# Altium PCB 7953_IDC_TO_RS.PcbDoc
Units mil, origin at the board's own origin, x right, y up, seen from the top; angles counter-clockwise.
Board outline 2874.02 x 2007.87 mil, 2 copper layers (Top Layer, Bottom Layer); 3 components, 30 nets, 204 pads, 0 vias.
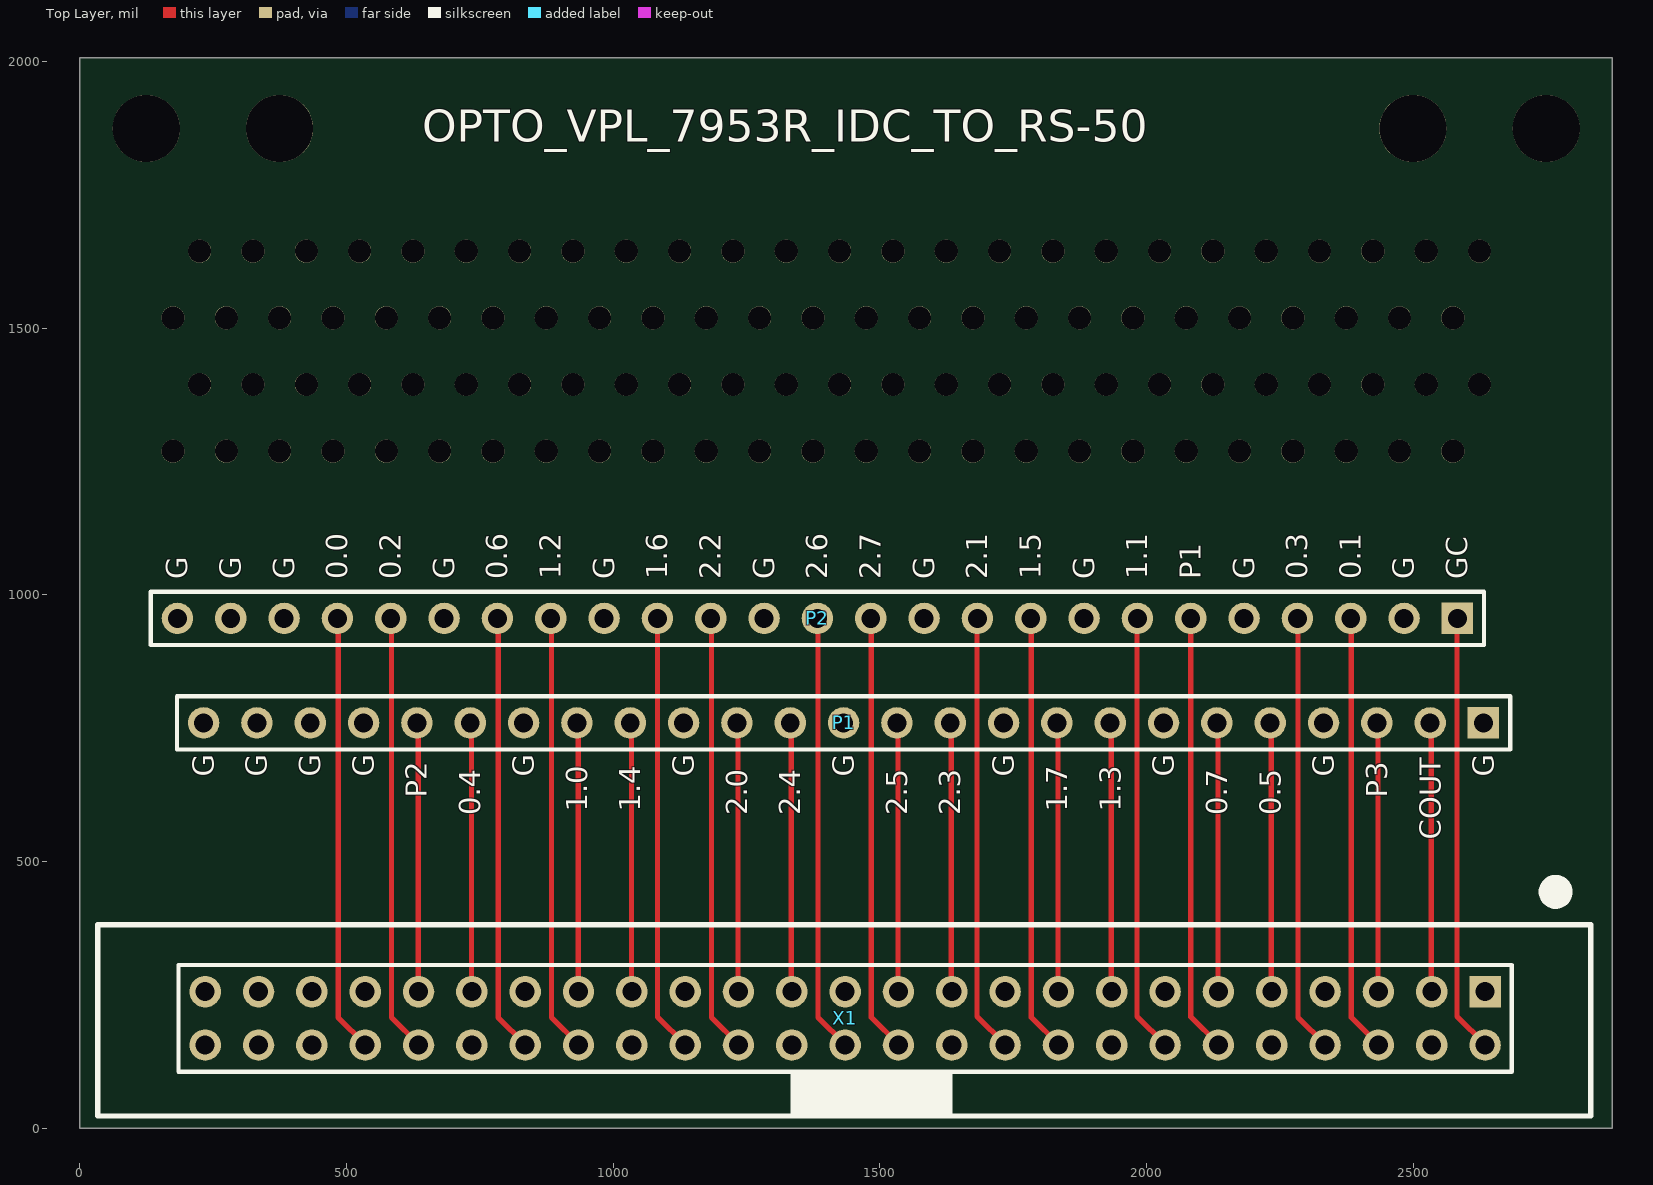
[diagram p0: Top Layer view]
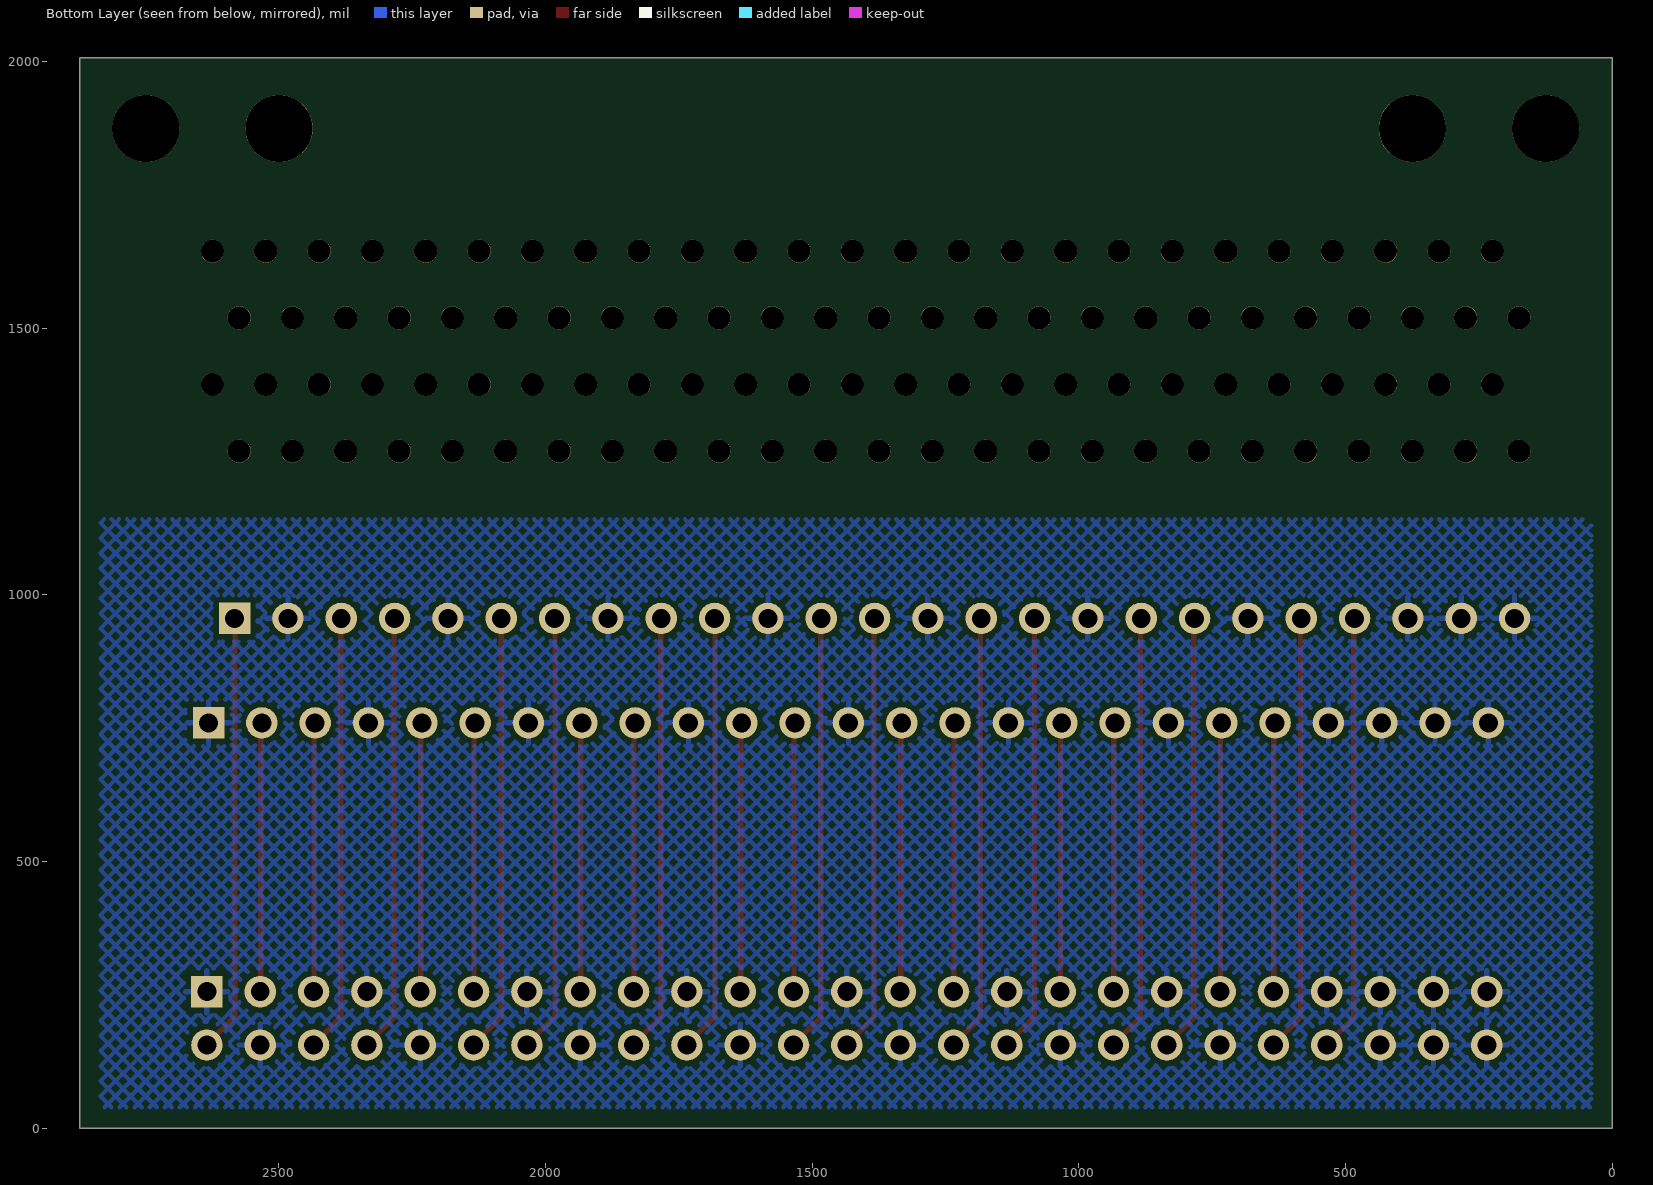
[diagram p1: Bottom Layer view, seen from below]

## Layer stack, top to bottom
Top Solder: solder mask 0.4, Solder Resist, Dk 3.5
Top Layer: signal copper 1.4
Dielectric 1: dielectric 12.6, FR-4, Dk 4.8
Bottom Layer: signal copper 1.4
Bottom Solder: solder mask 0.4, Solder Resist, Dk 3.5

## Board outline
-0.4,-0.41 -0.4,2007.46 2873.61,2007.46 2873.61,-0.41

## Design rules (kind name [scope] priority, off if disabled: settings)
Clearance [All] p1: gap=10 ignorepadtopadclearanceinfootprint=FALSE except(0: Arc-Hole Track-Hole SMDPad-Hole THPad-Hole Via-Hole Fill-Hole Poly-Hole Region-Hole Text-Hole)
PolygonConnect [All] p1: connectstyle=Relief reliefconductorwidth=10 reliefentries=4 polygonreliefangle="90 Angle" airgapwidth=10
RoutingVias [All] p1: holewidth=28 width=50 viastyle="Through Hole" minholewidth=28 minwidth=50 maxholewidth=28 maxwidth=50
SolderMaskExpansion [All] p1: expansion=4 istentingtop=FALSE
Width [All] p1: maxlimit=10 minlimit=10 preferedwidth=10
30 further rules are at their usual default settings.

## Classes and differential pairs
component class 7953_IDC_TO_RS: P1 X1

## Components (designator, comment, footprint, x,y, rotation, side; value= is the part's Value field where it differs from the comment)
P1 "Header 25" HDR1X25 2632,760 r180 top
P2 "Header 25" HDR1X25 2583,956 r180 top
X1 "IDC_7953" IDC_DIO 2635,256 r180 top

## Footprints (in the part's own frame and the unit in brackets; to place one, negate y for a bottom-side part, rotate by r counter-clockwise, add the part's x,y. Pads: shape width x height; smd on the part's side, far side on the other; paste and mask are expansions set on the pad)
HDR1X25 [mm] "Connector; Header; 25 Position"
  rect 1.5x1.5 hole 0.9: 1(0,0)
  round 1.5 hole 0.9: 2(2.54,0) 3(5.08,0) 4(7.62,0) 5(10.16,0) 6(12.7,0) 7(15.24,0) 8(17.78,0) 9(20.32,0) 10(22.86,0) 11(25.4,0) 12(27.94,0) 13(30.48,0) 14(33.02,0) 15(35.56,0) 16(38.1,0) 17(40.64,0) 18(43.18,0) 19(45.72,0) 20(48.26,0) 21(50.8,0) 22(53.34,0) 23(55.88,0) 24(58.42,0) 25(60.96,0)
  silkscreen extent -1.27,-1.27 62.23,1.27
IDC_DIO [mm]
  rect 1.5x1.5 hole 0.9: 1(0,0)
  round 1.5 hole 0.9: 2(0,2.54) 3(2.54,0) 4(2.54,2.54) 5(5.08,0) 6(5.08,2.54) 7(7.62,0) 8(7.62,2.54) 9(10.16,0) 10(10.16,2.54) 11(12.7,0) 12(12.7,2.54) 13(15.24,0) 14(15.24,2.54) 15(17.78,0) 16(17.78,2.54) 17(20.32,0) 18(20.32,2.54) 19(22.86,0) 20(22.86,2.54) 21(25.4,0) 22(25.4,2.54) 23(27.94,0) 24(27.94,2.54) 25(30.48,0) 26(30.48,2.54) 27(33.02,0) 28(33.02,2.54) 29(35.56,0) 30(35.56,2.54) 31(38.1,0) 32(38.1,2.54) 33(40.64,0) 34(40.64,2.54) 35(43.18,0) 36(43.18,2.54) 37(45.72,0) 38(45.72,2.54) 39(48.26,0) 40(48.26,2.54) 41(50.8,0) 42(50.8,2.54) 43(53.34,0) 44(53.34,2.54) 45(55.88,0) 46(55.88,2.54) 47(58.42,0) 48(58.42,2.54) 49(60.96,0) 50(60.96,2.54)
  silkscreen extent -5.03,-5.14 66.07,5.92

## Part data
P1 P2: "Header, 25-Pin", LatestRevisionDate=17-Jul-2002, LatestRevisionNote="Re-released for DXP Platform.", Publisher="Altium Limited"

## Free pads (board coordinates)
  round 125.98 hole 125.98 unplated: 0(124.6,1874.59) 0(374.6,1874.59) 0(2499.6,1874.59) 0(2749.6,1874.59)
  round 43.31 hole 43.31 unplated: 0(174.6,1269.59) 0(174.6,1519.59) 0(224.6,1394.59) 0(224.6,1644.59) 0(274.6,1269.59) 0(274.6,1519.59) 0(324.6,1394.59) 0(324.6,1644.59) 0(374.6,1269.59) 0(374.6,1519.59) 0(424.6,1394.59) 0(424.6,1644.59) 0(474.6,1269.59) 0(474.6,1519.59) 0(524.6,1394.59) 0(524.6,1644.59) 0(574.6,1269.59) 0(574.6,1519.59) 0(624.6,1394.59) 0(624.6,1644.59) 0(674.6,1269.59) 0(674.6,1519.59) 0(724.6,1394.59) 0(724.6,1644.59) 0(774.6,1269.59) 0(774.6,1519.59) 0(824.6,1394.59) 0(824.6,1644.59) 0(874.6,1269.59) 0(874.6,1519.59) 0(924.6,1394.59) 0(924.6,1644.59) 0(974.6,1269.59) 0(974.6,1519.59) 0(1024.6,1394.59) 0(1024.6,1644.59) 0(1074.6,1269.59) 0(1074.6,1519.59) 0(1124.6,1394.59) 0(1124.6,1644.59) 0(1174.6,1269.59) 0(1174.6,1519.59) 0(1224.6,1394.59) 0(1224.6,1644.59) 0(1274.6,1269.59) 0(1274.6,1519.59) 0(1324.6,1394.59) 0(1324.6,1644.59) 0(1374.6,1269.59) 0(1374.6,1519.59) 0(1424.6,1394.59) 0(1424.6,1644.59) 0(1474.6,1269.59) 0(1474.6,1519.59) 0(1524.6,1394.59) 0(1524.6,1644.59) 0(1574.6,1269.59) 0(1574.6,1519.59) 0(1624.6,1394.59) 0(1624.6,1644.59) 0(1674.6,1269.59) 0(1674.6,1519.59) 0(1724.6,1394.59) 0(1724.6,1644.59) 0(1774.6,1269.59) 0(1774.6,1519.59) 0(1824.6,1394.59) 0(1824.6,1644.59) 0(1874.6,1269.59) 0(1874.6,1519.59) 0(1924.6,1394.59) 0(1924.6,1644.59) 0(1974.6,1269.59) 0(1974.6,1519.59) 0(2024.6,1394.59) 0(2024.6,1644.59) 0(2074.6,1269.59) 0(2074.6,1519.59) 0(2124.6,1394.59) 0(2124.6,1644.59) 0(2174.6,1269.59) 0(2174.6,1519.59) 0(2224.6,1394.59) 0(2224.6,1644.59) 0(2274.6,1269.59) 0(2274.6,1519.59) 0(2324.6,1394.59) 0(2324.6,1644.59) 0(2374.6,1269.59) 0(2374.6,1519.59) 0(2424.6,1394.59) 0(2424.6,1644.59) 0(2474.6,1269.59) 0(2474.6,1519.59) 0(2524.6,1394.59) 0(2524.6,1644.59) 0(2574.6,1269.59) 0(2574.6,1519.59) 0(2624.6,1394.59) 0(2624.6,1644.59)

## Nets (pads, with @x,y where several pads share a name; then routed paths per layer and width w, separated by ;. In a path a pad name is that pad's centre, name@x,y a point inside that pad or via, vN(x,y) a via of type N, cw(c..) or ccw(c..) an arc to the next point about the centre after c; other vN are vias at no path point)
CLKOUT: P1.2 X1.3 | length 500.3
  Top Layer w10: X1.3@2534.24,257.59 P1.2@2534.24,757.85
GCLK0: P2.1 X1.2 | length 820.1
  Top Layer w10: P2.1@2582.24,956 2582.24,295.85 2582.24,209.85 X1.2@2634.55,157.54
GND: P1.1 P1.4 P1.7 P1.10 P1.13 P1.16 P1.19 P1.22 P1.23 P1.24 P1.25 P2.2 P2.5 P2.8 P2.11 P2.14 P2.17 P2.20 P2.23 P2.24 P2.25 X1.1 X1.4 X1.7 X1.10 X1.13 X1.16 X1.19 X1.22 X1.25 X1.28 X1.31 X1.34 X1.37 X1.40 X1.43 X1.45 X1.46 X1.47 X1.48 X1.49 X1.50
P0.0: P2.22 X1.44 | length 821.2
  Top Layer w10: P2.22@484.24,957.85 484.24,312.85 484.24,207.85 X1.44@534.55,157.54
P0.1: P2.3 X1.6 | length 821.2
  Top Layer w10: P2.3@2384.24,957.85 2384.24,326.85 2384.24,207.85 X1.6@2434.55,157.54
P0.2: P2.21 X1.42 | length 821.2
  Top Layer w10: P2.21@584.24,957.85 584.24,299.85 584.24,207.85 X1.42@634.55,157.54
P0.3: P2.4 X1.8 | length 821.2
  Top Layer w10: P2.4@2284.24,957.85 2284.24,291.85 2284.24,207.85 X1.8@2334.55,157.54
P0.4: P1.20 X1.39 | length 500.3
  Top Layer w10: X1.39@734.24,257.59 P1.20@734.24,757.85
P0.5: P1.5 X1.9 | length 500.3
  Top Layer w10: X1.9@2234.24,257.59 P1.5@2234.24,757.85
P0.6: P2.19 X1.38 | length 821.2
  Top Layer w10: P2.19@784.24,957.85 784.24,349.85 784.24,207.85 X1.38@834.55,157.54
P0.7: P1.6 X1.11 | length 500.3
  Top Layer w10: X1.11@2134.24,257.59 P1.6@2134.24,757.85
P1.0: P1.18 X1.35 | length 500.3
  Top Layer w10: X1.35@934.24,257.59 P1.18@934.24,757.85
P1.1: P2.7 X1.14 | length 822
  Top Layer w10: P2.7@1982.24,957.85 1982.24,297.85 1982.24,209.85 X1.14@2034.55,157.54
P1.2: P2.18 X1.36 | length 821.2
  Top Layer w10: P2.18@884.24,957.85 884.24,207.85 X1.36@934.55,157.54
P1.3: P1.8 X1.15 | length 500.3
  Top Layer w10: X1.15@1934.24,257.59 P1.8@1934.24,757.85
P1.4: P1.17 X1.33 | length 500.3
  Top Layer w10: X1.33@1034.24,257.59 P1.17@1034.24,757.85
P1.5: P2.9 X1.18 | length 821.2
  Top Layer w10: P2.9@1784.24,957.85 1784.24,331.85 1784.24,207.85 X1.18@1834.55,157.54
P1.6: P2.16 X1.32 | length 821.6
  Top Layer w10: P2.16@1083.24,957.85 1083.24,367.85 1083.24,208.85 X1.32@1134.55,157.54
P1.7: P1.9 X1.17 | length 500.3
  Top Layer w10: X1.17@1834.24,257.59 P1.9@1834.24,757.85
P2.0: P1.15 X1.29 | length 500.3
  Top Layer w10: X1.29@1234.24,257.59 P1.15@1234.24,757.85
P2.1: P2.10 X1.20 | length 822
  Top Layer w10: P2.10@1682.24,957.85 1682.24,303.85 1682.24,209.85 X1.20@1734.55,157.54
P2.2: P2.15 X1.30 | length 821.2
  Top Layer w10: P2.15@1184.24,957.85 1184.24,327.85 1184.24,207.85 X1.30@1234.55,157.54
P2.3: P1.11 X1.21 | length 500.3
  Top Layer w10: X1.21@1634.24,257.59 P1.11@1634.24,757.85
P2.4: P1.14 X1.27 | length 500.3
  Top Layer w10: X1.27@1334.24,257.59 P1.14@1334.24,757.85
P2.5: P1.12 X1.23 | length 500.3
  Top Layer w10: X1.23@1534.24,257.59 P1.12@1534.24,757.85
P2.6: P2.13 X1.26 | length 821.2
  Top Layer w10: P2.13@1384.24,957.85 1384.24,303.85 1384.24,207.85 X1.26@1434.55,157.54
P2.7: P2.12 X1.24 | length 821.2
  Top Layer w10: P2.12@1484.24,957.85 1484.24,338.85 1484.24,207.85 X1.24@1534.55,157.54
PFI1: P2.6 X1.12 | length 821.6
  Top Layer w10: P2.6@2083.24,957.85 2083.24,309.85 2083.24,208.85 X1.12@2134.55,157.54
PFI2: P1.21 X1.41 | length 500.3
  Top Layer w10: X1.41@634.24,257.59 P1.21@634.24,757.85
PFI3: P1.3 X1.5 | length 500.3
  Top Layer w10: X1.5@2434.24,257.59 P1.3@2434.24,757.85

## Polygon pours and split planes (outlines as drawn)
GND on Bottom Layer "Top Overlay-No Net" (hatched 45Degree grid 20 track 8, remove dead copper, pour order 0): 39.37,39.37 39.37,1141.73 2834.65,1141.73 2834.65,39.37

## Silkscreen, mask and mechanical layers (free items; w line width, h text height)
Top Overlay:
  text "OPTO_VPL_7953R_IDC_TO_RS-50" at 641.86,1849.59 h60
  text "G" at 201.68,1029.08 h39.37 r90
  text "G" at 301.68,1029.08 h39.37 r90
  text "G" at 401.68,1029.08 h39.37 r90
  text "0.0" at 501.68,1029.08 h39.37 r90
  text "0.2" at 601.68,1029.08 h39.37 r90
  text "G" at 701.68,1029.08 h39.37 r90
  text "0.6" at 801.68,1029.08 h39.37 r90
  text "1.2" at 901.68,1029.08 h39.37 r90
  text "G" at 1001.68,1029.08 h39.37 r90
  text "1.6" at 1101.68,1029.08 h39.37 r90
  text "2.2" at 1201.68,1029.08 h39.37 r90
  text "G" at 1301.68,1029.08 h39.37 r90
  text "2.6" at 1401.68,1029.08 h39.37 r90
  text "2.7" at 1501.68,1029.08 h39.37 r90
  text "G" at 1601.68,1029.08 h39.37 r90
  text "2.1" at 1701.68,1029.08 h39.37 r90
  text "1.5" at 1801.68,1029.08 h39.37 r90
  text "G" at 1901.68,1029.08 h39.37 r90
  text "1.1" at 2001.68,1029.08 h39.37 r90
  text "P1" at 2101.68,1029.08 h39.37 r90
  text "G" at 2201.68,1029.08 h39.37 r90
  text "0.3" at 2301.68,1029.08 h39.37 r90
  text "0.1" at 2401.68,1029.08 h39.37 r90
  text "G" at 2501.68,1029.08 h39.37 r90
  text "GC" at 2601.68,1029.08 h39.37 r90
  text "G" at 250.68,658.96 h39.37 r90
  text "G" at 350.72,658.96 h39.37 r90
  text "G" at 450.76,658.96 h39.37 r90
  text "G" at 550.8,658.96 h39.37 r90
  text "G" at 850.93,658.96 h39.37 r90
  text "G" at 1151.05,658.96 h39.37 r90
  text "G" at 1451.18,658.96 h39.37 r90
  text "G" at 1751.3,658.96 h39.37 r90
  text "G" at 2051.43,658.96 h39.37 r90
  text "G" at 2351.55,658.96 h39.37 r90
  text "G" at 2651.68,658.96 h39.37 r90
  text "P2" at 650.84,619.6 h39.37 r90
  text "P3" at 2451.59,619.6 h39.37 r90
  text "1.0" at 950.97,593.36 h39.37 r90
  text "1.4" at 1051.01,593.36 h39.37 r90
  text "1.7" at 1851.34,593.36 h39.37 r90
  text "1.3" at 1951.39,593.36 h39.37 r90
  text "0.4" at 750.89,586.8 h39.37 r90
  text "2.0" at 1251.09,586.8 h39.37 r90
  text "2.4" at 1351.14,586.8 h39.37 r90
  text "2.5" at 1551.22,586.8 h39.37 r90
  text "2.3" at 1651.26,586.8 h39.37 r90
  text "0.7" at 2151.47,586.8 h39.37 r90
  text "0.5" at 2251.51,586.8 h39.37 r90
  text "COUT" at 2551.64,540.89 h39.37 r90
Mechanical 1:
  the board outline again, w10